# Altium PCB PPE2.PcbDoc (part 1 of 2)
Units mm, origin at the board's own origin, x right, y up, seen from the top; angles counter-clockwise.
Board outline 200 x 160 mm, 2 copper layers (Top Layer, Bottom Layer); 211 components, 151 nets, 640 pads, 213 vias.
Unrouted connection lines stored in the file: 3.
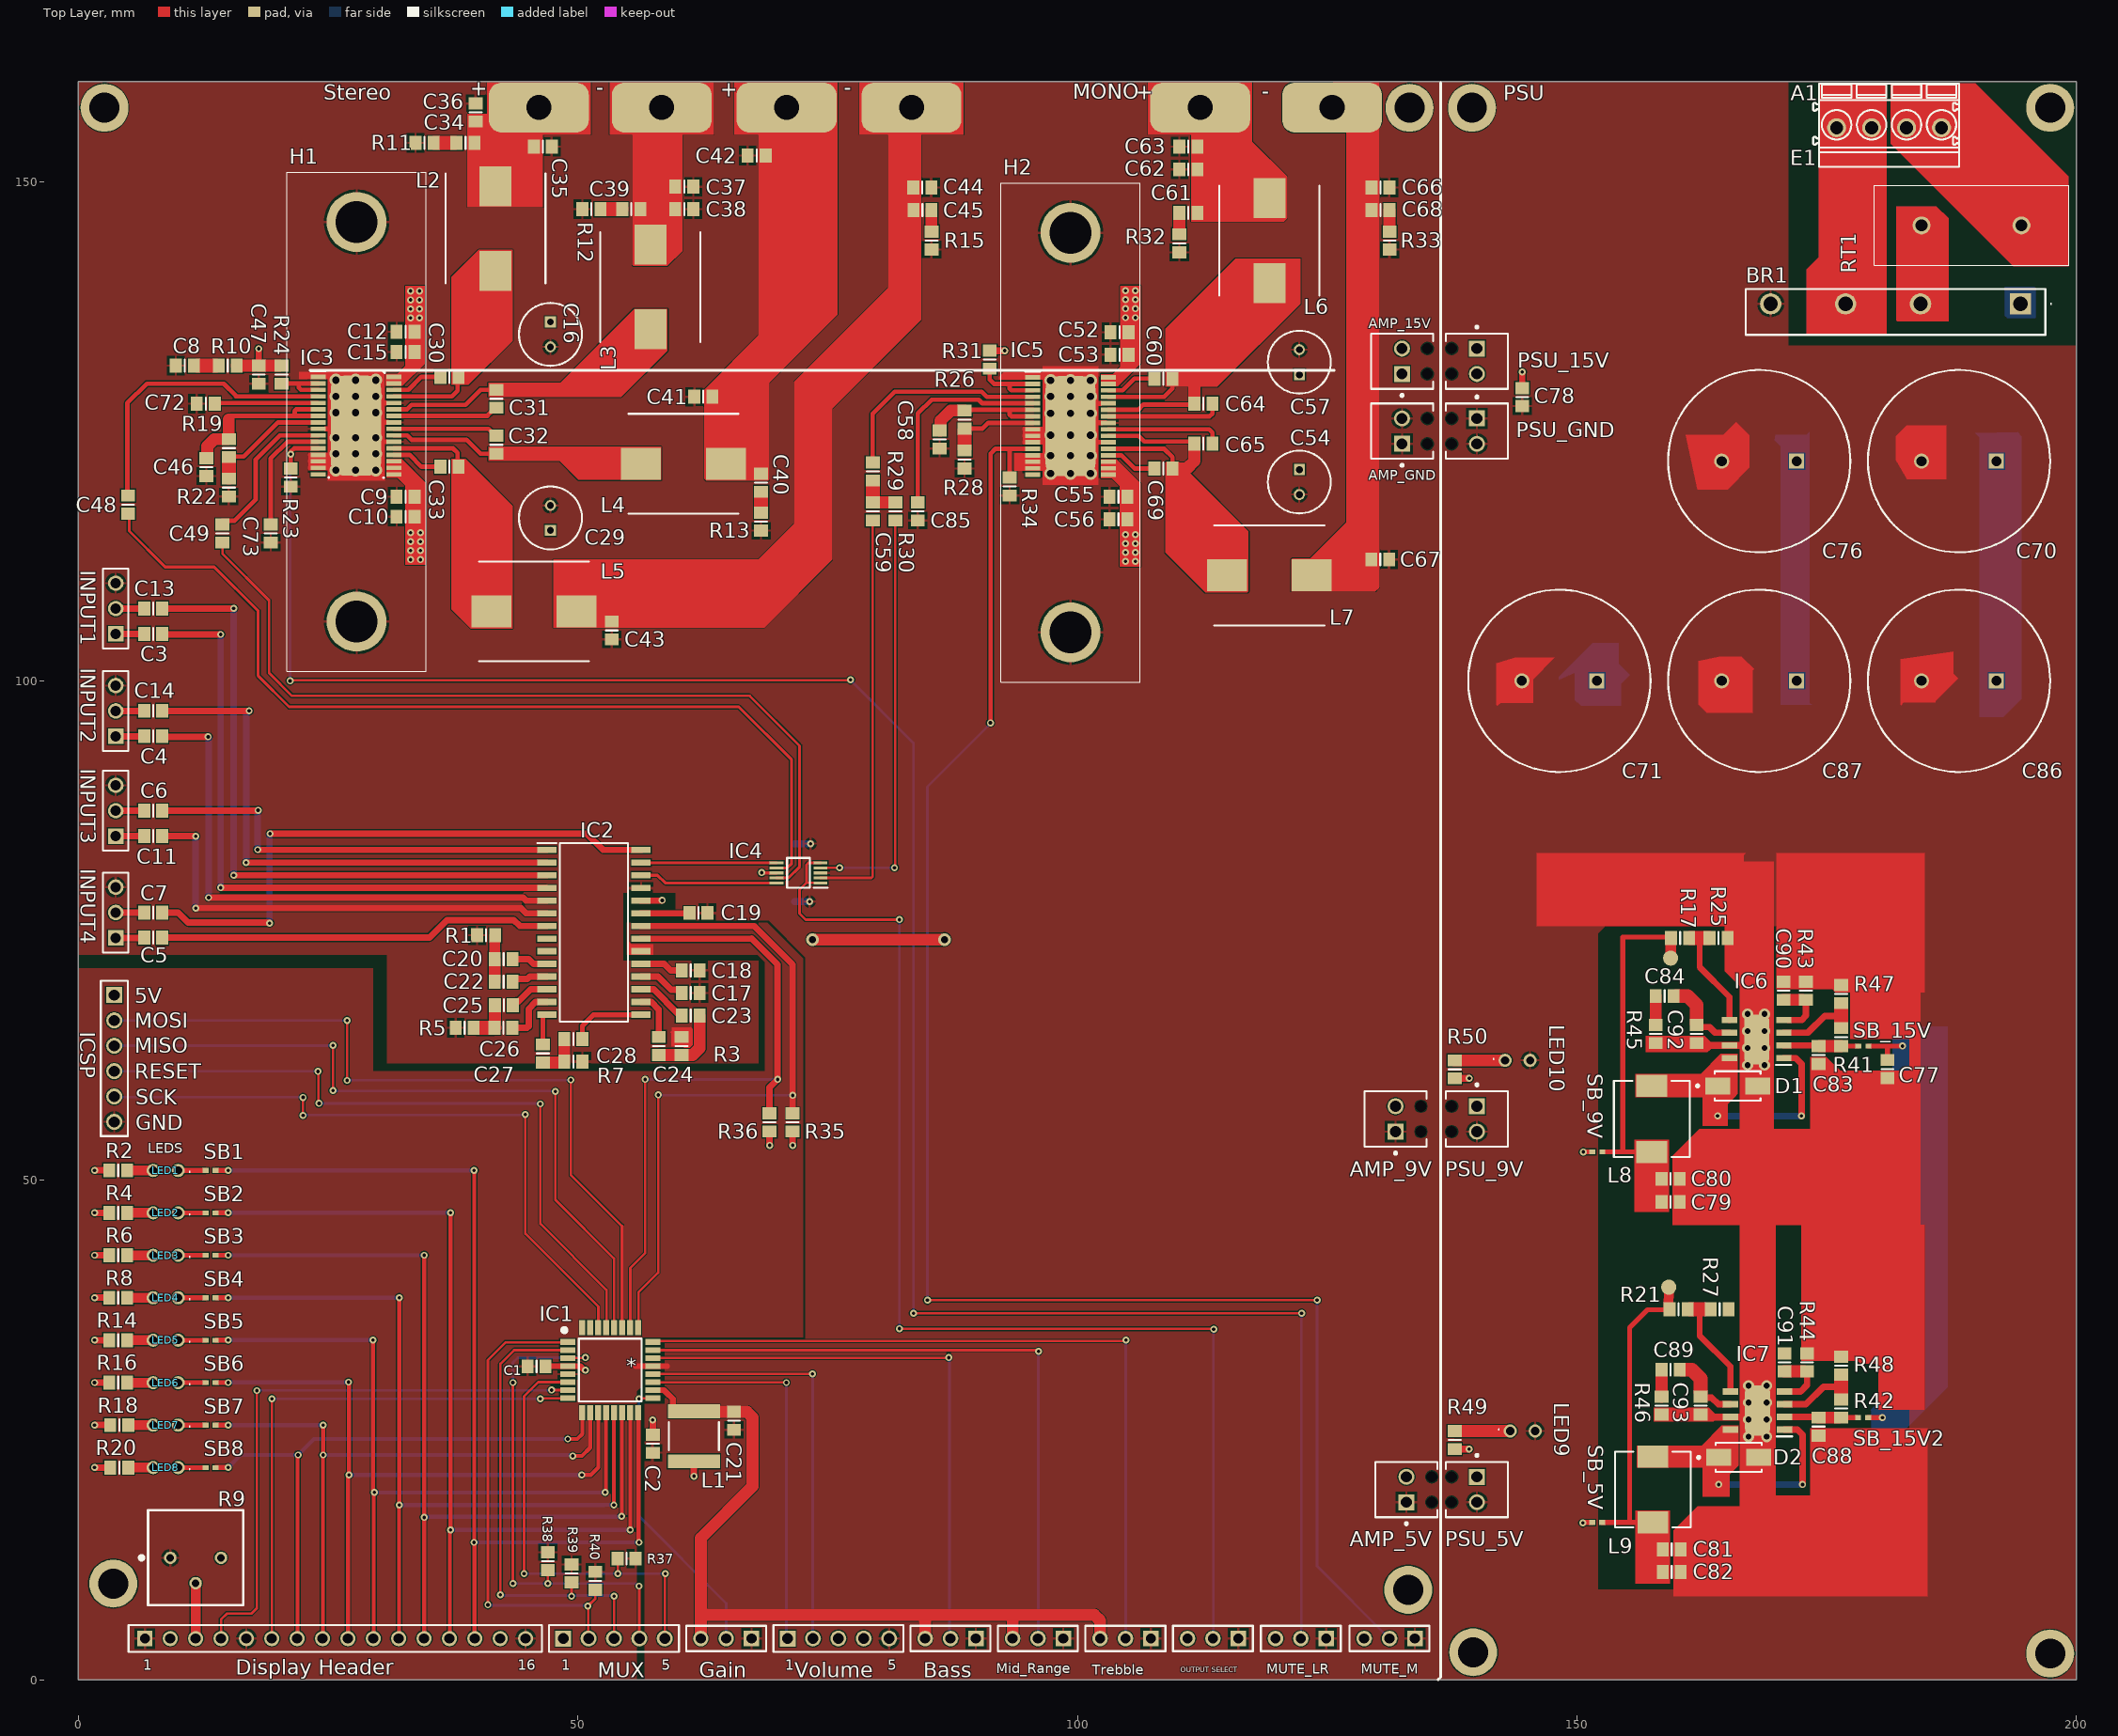
[diagram p0: Top Layer view]
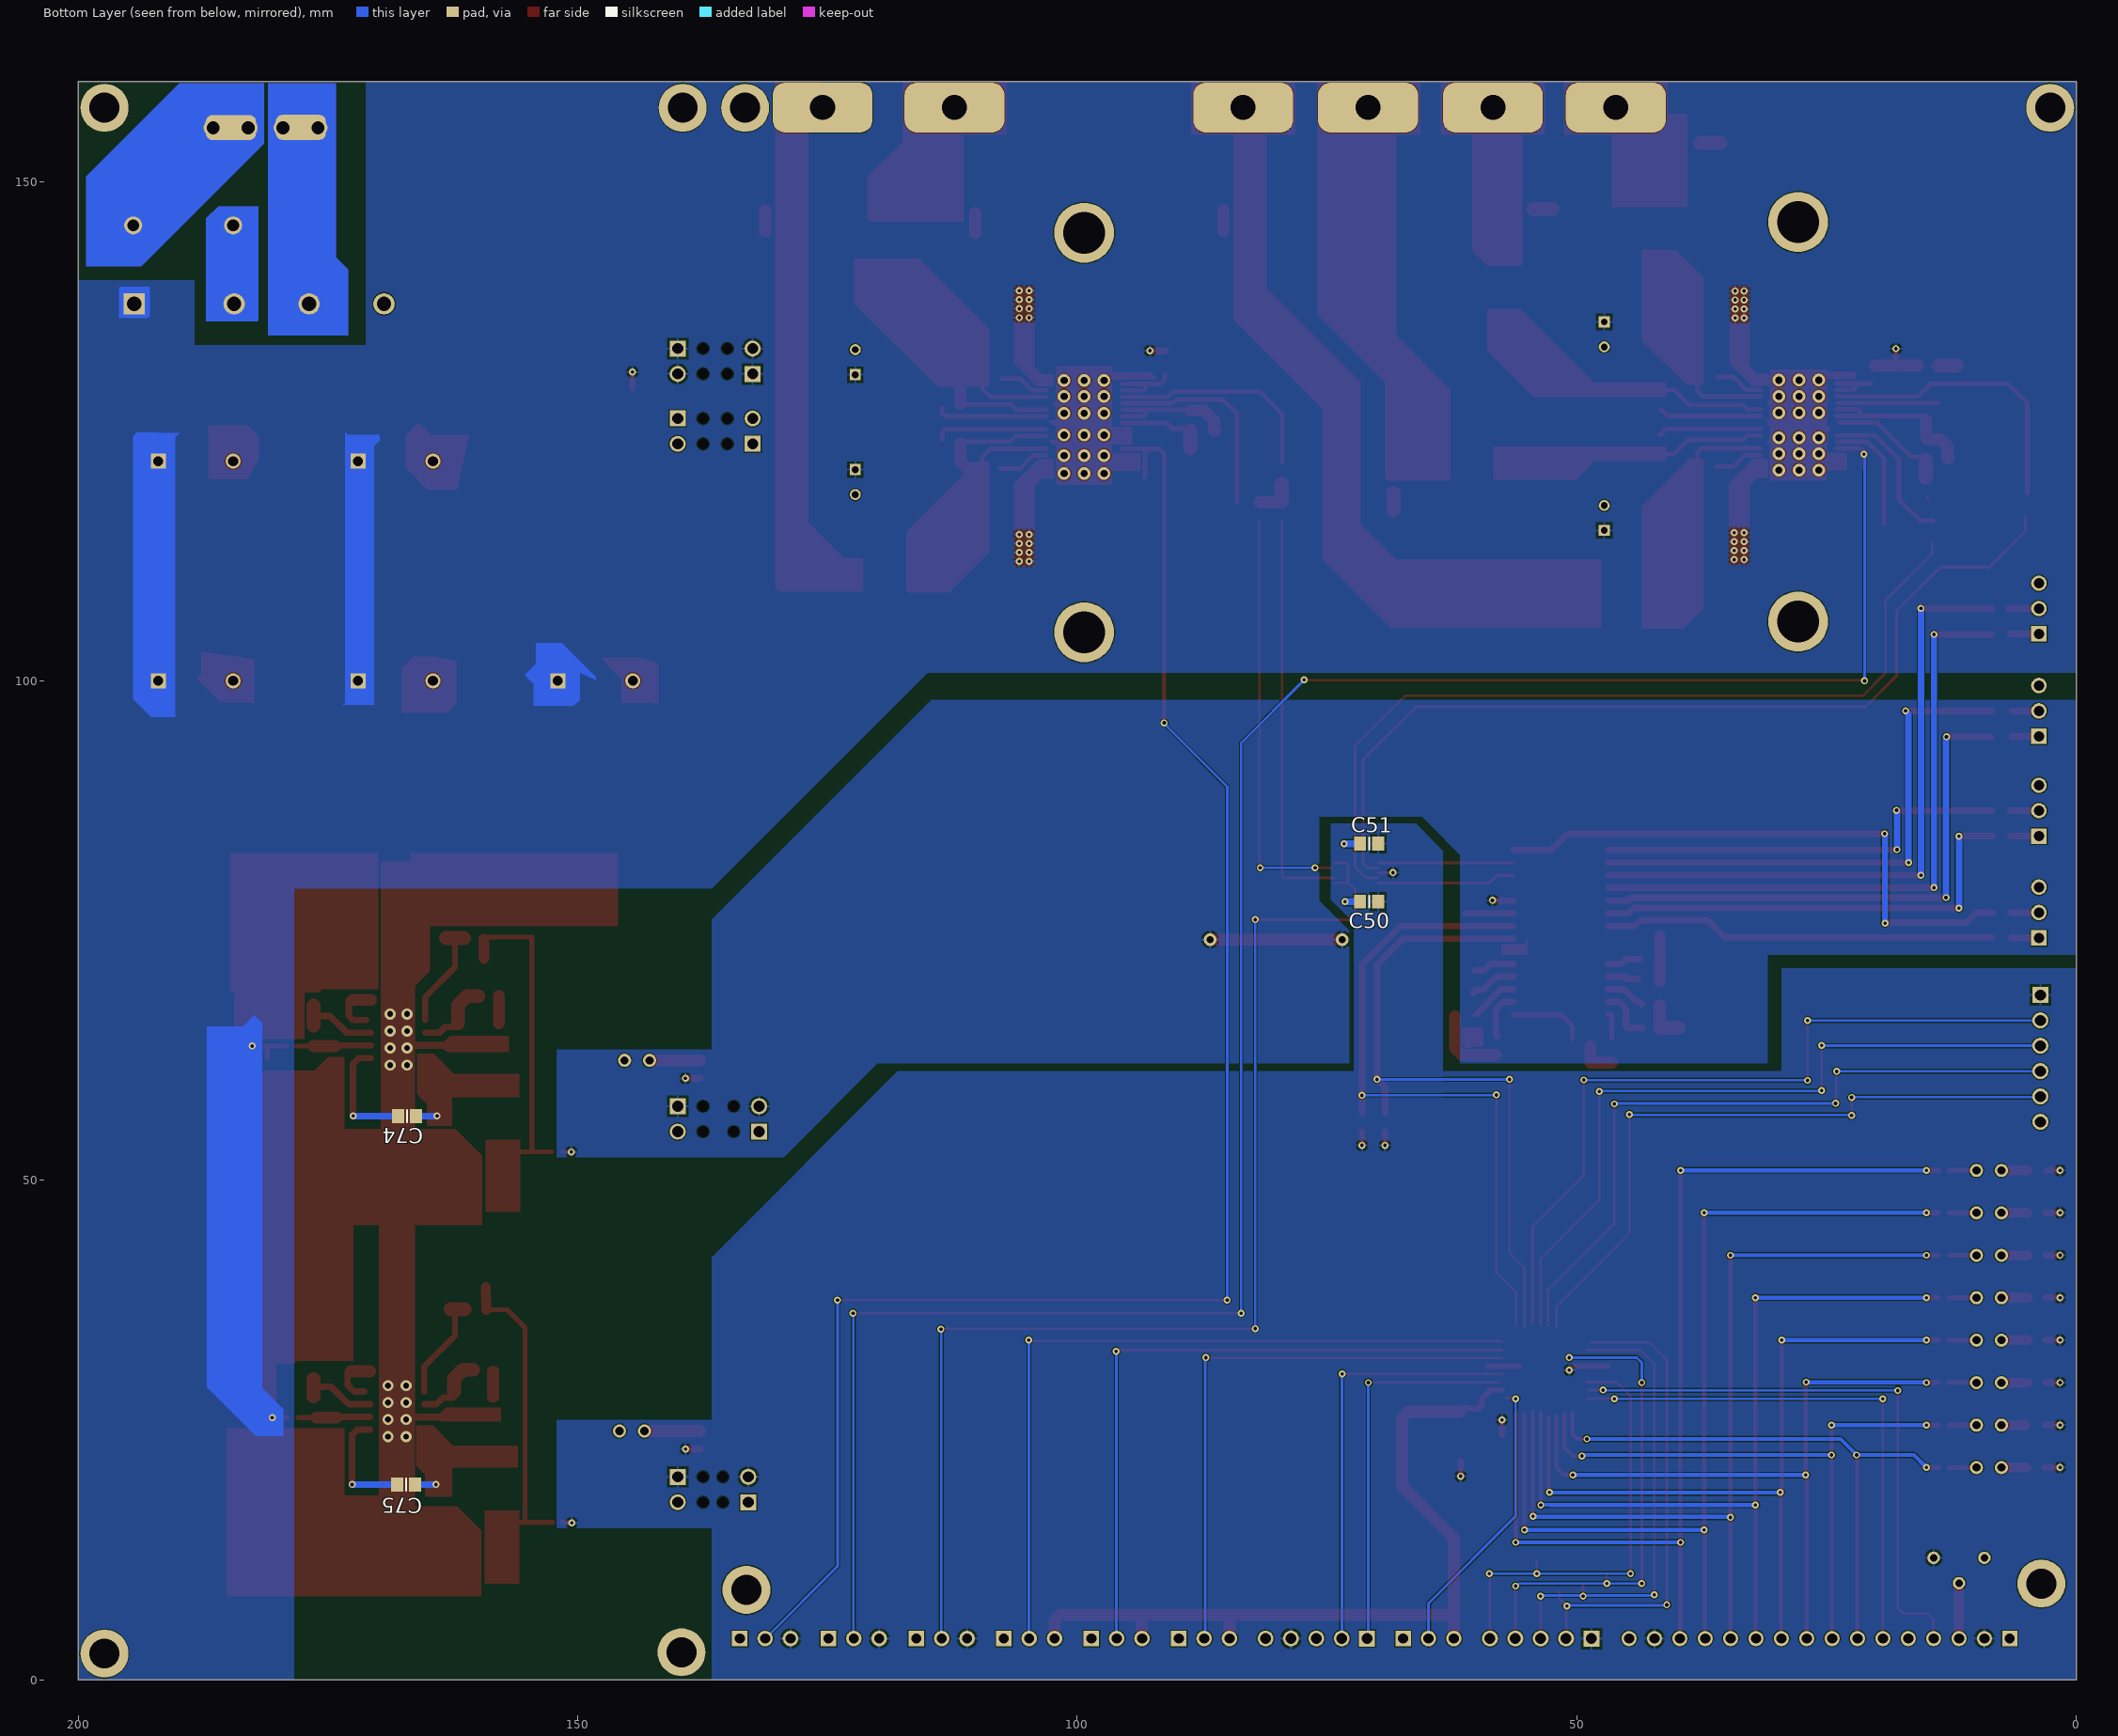
[diagram p1: Bottom Layer view, seen from below]

## Layer stack, top to bottom
Top Solder: solder mask 0.0102, Solder Resist, Dk 3.5
Top Layer: signal copper 0.0356
Dielectric 1: dielectric 0.32, FR-4, Dk 4.8
Bottom Layer: signal copper 0.0356
Bottom Solder: solder mask 0.0102, Solder Resist, Dk 3.5

## Board outline
0,0 0,160 200,160 200,0

## Design rules (kind name [scope] priority, off if disabled: settings)
Clearance [All] p1: gap=0.1 ignorepadtopadclearanceinfootprint=TRUE
PolygonConnect [All] p1: connectstyle=Relief reliefconductorwidth=0.254 reliefentries=4 polygonreliefangle="90 Angle" airgapwidth=0.254
RoutingVias [All] p1: holewidth=0.35 width=0.7 viastyle="Through Hole" minholewidth=0.3 minwidth=0.6 maxholewidth=0.4 maxwidth=0.8
SilkToSilkClearance [All] p1: silktosilkclearance=0.1
SolderMaskExpansion [All] p1: expansion=0.102 istentingtop=FALSE
Width [All] p1: maxlimit=5 minlimit=0.254 preferedwidth=0.254 minimp=50.000000 maximp=50.000000 favimp=50.000000
29 further rules are at their usual default settings.

## Classes and differential pairs
net class PA[9..0]: PA0 PA1 PA2 PA3 PA4 PA5 PA6 PA7 PA8 PA9
net class MUX[3..0]: MUX0 MUX1 MUX2 MUX3
component class Main: R35 R36
component class Designator: C8 C9 C10 C12 C15 C16 C29 C30 C31 C32 C33 C34 C35 C36 C37 C38 C39 C40 C41 C42 C43 C44 C45 C46 C47 C48 C49 C72 C73 H1 IC3 L2 L3 L4 L5 R10 R11 R12 R13 R15 R19 R22 R23 R24

## Components (designator, comment, footprint, x,y, rotation, side; value= is the part's Value field where it differs from the comment)
AMP_5V "1725656" PHOE-1725656-2 132.938,19.043 r90 top
AMP_9V "1725656" PHOE-1725656-2 131.851,56.142 r90 top
AMP_15V "1725656" PHOE-1725656-2 132.5,132 r90 top
AMP_GND "1725656" PHOE-1725656-2 132.5,125 r90 top
Bass "TSW-103-07-F-S" SMTC-TSW-103-07-X-S 89.848,4.125 r180 top
BR1 "GBJ3510_T0_00601" GBJ3510_T0_00601 194.4,137.746 r180 top
C1 "0805" 6-0805_N 45.875,31.375 r180 top value=100nF
C2 "0805" 6-0805_N 57.5,23.625 r270 top value=100nF
C3 "0805" 6-0805_N 7.5,104.7 r0 top value=470nF
C4 "0805" 6-0805_N 7.5,94.464 r0 top value=470nF
C5 "0805" 6-0805_N 7.5,74.29 r0 top value=470nF
C6 "0805" 6-0805_N 7.5,87 r0 top value=470nF
C7 "0805" 6-0805_N 7.5,76.8 r0 top value=470nF
C8 "0805" 6-0805_N 10.66,131.555 r180 top value=100nF
C9 "0805" 6-0805_N 32.76,118.44 r180 top value=1nF
C10 "0805" 6-0805_N 32.76,116.44 r180 top value=100nF
C11 "0805" 6-0805_N 7.5,84.45 r0 top value=470nF
C12 "0805" 6-0805_N 32.76,134.94 r180 top value=1nF
C13 "0805" 6-0805_N 7.5,107.25 r0 top value=470nF
C14 "0805" 6-0805_N 7.5,97 r0 top value=470nF
C15 "0805" 6-0805_N 32.76,132.94 r180 top value=100nF
C16 "860010373010" CAPPRD250W52D630H1250 47.26,135.94 r270 top
C17 "0805" 6-0805_N 61.3,68.755 r0 top value=5.6nF
C18 "0805" 6-0805_N 61.3,71.009 r0 top value=5.6nF
C19 "0805" 6-0805_N 62.075,76.775 r0 top value=10uF
C20 "0805" 6-0805_N 42.575,72.15 r180 top value=18nF
C21 "0805" 6-0805_N 65.625,25.921 r270 top value=100nF
C22 "0805" 6-0805_N 42.575,69.896 r180 top value=22nF
C23 "0805" 6-0805_N 61.3,66.5 r0 top value=18nF
C24 "0805" 6-0805_N 58.1,63.446 r270 top value=22nF
C25 "0805" 6-0805_N 42.6,67.525 r180 top value=100nF
C26 "0805" 6-0805_N 42.55,65.271 r180 top value=100nF
C27 "0805" 6-0805_N 46.5,62.7 r270 top value=100nF
C28 "0805" 6-0805_N 49.554,64.154 r180 top value=100nF
C29 "860010373010" CAPPRD250W52D630H1250 47.26,115.059 r90 top
C30 "0805" 6-0805_N 37.16,130.44 r0 top value=220nF
C31 "0805" 6-0805_N 41.86,128.24 r90 top value=220nF
C32 "0805" 6-0805_N 41.86,123.64 r270 top value=220nF
C33 "0805" 6-0805_N 37.16,121.44 r0 top value=220nF
C34 "0805" 6-0805_N 38.76,153.855 r0 top value=10nF
C35 "0805" 6-0805_N 46.5,153.5 r180 top value=1nF
C36 "0805" 6-0805_N 39.76,156.909 r270 top value=680nF
C37 "0805" 6-0805_N 60.66,149.474 r0 top value=1nF
C38 "0805" 6-0805_N 60.66,147.219 r0 top value=680nF
C39 "0805" 6-0805_N 55.36,147.219 r180 top value=10nF
C40 "0805" 6-0805_N 68.35,119.84 r90 top value=10nF
C41 "0805" 6-0805_N 62.56,128.44 r0 top value=680nF
C42 "0805" 6-0805_N 67.9,152.6 r0 top value=1nF
C43 "0805" 6-0805_N 53.397,105.051 r270 top value=680nF
C44 "0805" 6-0805_N 84.49,149.387 r0 top value=1nF
C45 "0805" 6-0805_N 84.493,147.133 r0 top value=10nF
C46 "0805" 6-0805_N 12.806,121.4 r270 top value=1uF
C47 "0805" 6-0805_N 18.06,130.655 r270 top value=10nF
C48 "0805" 6-0805_N 4.99,117.65 r90 top value=3.3uF
C49 "0805" 6-0805_N 14.43,114.755 r90 top value=3.3uF
C50 "0805" 6-0805_N 70.8,77.9 r0 bottom value=100nF
C51 "0805" 6-0805_N 70.8,83.7 r0 bottom value=1nF
C52 "0805" 6-0805_N 104.22,134.914 r180 top value=1nF
C53 "0805" 6-0805_N 104.22,132.66 r180 top value=100nF
C54 "860010373010" CAPPRD250W52D630H1250 122.22,121.16 r270 top
C55 "0805" 6-0805_N 104.12,118.431 r180 top value=1nF
C56 "0805" 6-0805_N 104.12,116.177 r180 top value=100nF
C57 "860010373010" CAPPRD250W52D630H1250 122.22,130.66 r90 top
C58 "0805" 6-0805_N 86.22,124.16 r270 top value=1uF
C59 "0805" 6-0805_N 79.52,120.96 r90 top value=10uF
C60 "0805" 6-0805_N 108.62,130.26 r0 top value=220nF
C61 "0805" 6-0805_N 111.12,146.86 r0 top value=10nF
C62 "0805" 6-0805_N 111.12,151.202 r0 top value=1nF
C63 "0805" 6-0805_N 111.12,153.481 r0 top value=1uF
C64 "0805" 6-0805_N 112.62,127.76 r180 top value=220nF
C65 "0805" 6-0805_N 112.62,123.76 r180 top value=220nF
C66 "0805" 6-0805_N 130.345,149.382 r0 top value=1uF
C67 "0805" 6-0805_N 130.32,112.16 r0 top value=1nF
C68 "0805" 6-0805_N 130.349,147.128 r0 top value=10nF
C69 "0805" 6-0805_N 108.62,121.26 r0 top value=220nF
C70 "UFW1V472MHD" CAPPRD750W80D1825H3750 192,122 r180 top
C71 "UFW1V472MHD" CAPPRD750W80D1825H3750 152,100 r180 top
C72 "0805" 6-0805_N 12.76,127.755 r0 top value=3.3uF
C73 "0805" 6-0805_N 19.26,114.755 r90 top value=3.3uF
C74 "0805" 6-0805_N 167.089,56.442 r180 bottom value=100nF
C75 "0805" 6-0805_N 167.189,19.543 r180 bottom value=100nF
C76 "UFW1V472MHD" CAPPRD750W80D1825H3750 172,122 r180 top
C77 "0805" 6-0805_N 181.089,61.142 r270 top value=100nf
C78 "0805" 6-0805_N 144.531,128.414 r270 top value=100nf
C79 "0805" 6-0805_N 159.389,47.842 r180 top value=47uF
C80 "0805" 6-0805_N 159.389,50.142 r180 top value=47uF
C81 "0805" 6-0805_N 159.489,13.039 r180 top value=47uF
C82 "0805" 6-0805_N 159.489,10.784 r180 top value=47uF
C83 "0805" 6-0805_N 174.189,62.542 r90 top value=10uF
C84 "0805" 6-0805_N 158.789,68.442 r0 top value=180pF
C85 "0805" 6-0805_N 84.029,116.96 r90 top value=10uF
C86 "UFW1V472MHD" CAPPRD750W80D1825H3750 192,100 r180 top
C87 "UFW1V472MHD" CAPPRD750W80D1825H3750 172,100 r180 top
C88 "0805" 6-0805_N 174.189,25.343 r90 top value=10uF
C89 "0805" 6-0805_N 159.389,31.043 r0 top value=180pF
C90 "0805" 6-0805_N 170.689,68.971 r270 top value=15nF
C91 "0805" 6-0805_N 170.789,31.772 r270 top value=15nF
C92 "0805" 6-0805_N 161.989,64.642 r90 top value=10pF
C93 "0805" 6-0805_N 162.389,27.443 r90 top value=10pF
D1 "B320A-13-F" FP-SMA-MFG 166.089,59.453 r0 top value=200pF
D2 "B320A-13-F" FP-SMA-MFG 166.189,22.254 r0 top value=200pF
"Display Header" "61301611821" 61301611821 25.721,4.125 r0 top
E1 "1845040000" LM_3_5_90_04 181.25,155.625 r180 top
Gain "TSW-103-07-F-S" SMTC-TSW-103-07-X-S 67.389,4.125 r180 top
H1 "ATS-TI1OP-521-C1-R1" ATSTI1OP521C1R1 27.86,105.94 r90 top locked
H2 "ATS-TI1OP-521-C1-R1" ATSTI1OP521C1R1 99.32,104.86 r90 top
IC1 "ATTINY828-AU" QFP80P900X900X120-32N 53.25,31 r0 top
IC2 "TDA7439DS13TR" SOIC127P1032X265-28N 51.613,74.825 r0 top
IC3 "TPA3116D2QDADRQ1" SOP65P810X120-33N 27.798,125.555 r0 top
IC4 "TS5A23157DGSRE4" SOP50P490X110-10N 72.092,80.775 r180 top
IC5 "TPA3116D2QDADRQ1" SOP65P810X120-33N 99.32,125.51 r0 top
IC6 "TPS54332DDA" SOIC127P600X170-9N 167.989,64.142 r180 top
IC7 "TPS54332DDA" SOIC127P600X170-9N 168.077,26.943 r180 top
ICSP "61300611121" 61300611121 3.6,62.2 r270 top
INPUT1 "TSW-103-07-F-S" SMTC-TSW-103-07-X-S 3.75,104.7 r90 top
INPUT2 "TSW-103-07-F-S" SMTC-TSW-103-07-X-S 3.75,94.45 r90 top
INPUT3 "TSW-103-07-F-S" SMTC-TSW-103-07-X-S 3.75,84.46 r90 top
INPUT4 "TSW-103-07-F-S" SMTC-TSW-103-07-X-S 3.75,74.27 r90 top
L1 "Inductor" 2220 61.621,24.371 r90 top value=10mH
L2 "10uH" INDPM110100X400N 41.76,145.284 r90 top
L3 "10uH" INDPM110100X400N 57.26,139.44 r90 top
L4 "10uH" INDPM110100X400N 60.57,121.74 r0 top
L5 "10uH" INDPM110100X400N 45.618,106.955 r0 top
L6 "10uH" INDPM110100X400N 119.22,144.085 r90 top
L7 "10uH" INDPM110100X400N 119.22,110.556 r0 top
L8 "2.5uF" 710-74437346025 157.51,56.142 r270 top
L9 "2.5uF" 710-74437346025 157.61,19.043 r270 top
LED1 "ELM70303GD" ELM70303GD 10,50.99 r90 top
LED2 "ELM70303GD" ELM70303GD 10,46.74 r90 top
LED3 "ELM70303GD" ELM70303GD 10,42.49 r90 top
LED4 "ELM70303GD" ELM70303GD 10,38.24 r90 top
LED5 "ELM70303GD" ELM70303GD 10,33.99 r90 top
LED6 "ELM70303GD" ELM70303GD 10,29.74 r90 top
LED7 "ELM70303GD" ELM70303GD 10,25.49 r90 top
LED8 "ELM70303GD" ELM70303GD 10,21.24 r90 top
LED9 "ELM70303GD" ELM70303GD 143.33,24.9 r270 top
LED10 "ELM70303GD" ELM70303GD 142.82,62.01 r270 top
Mid_Range "TSW-103-07-F-S" SMTC-TSW-103-07-X-S 98.602,4.125 r180 top
MUTE_LR "TSW-103-07-F-S" SMTC-TSW-103-07-X-S 124.915,4.125 r180 top
MUTE_M "TSW-103-07-F-S" SMTC-TSW-103-07-X-S 133.79,4.125 r180 top
MUX "61300511121" 61300511121 53.62,4.125 r0 top
"OUTPUT SELECT" "TSW-103-07-F-S" SMTC-TSW-103-07-X-S 116.111,4.125 r180 top
PSU_5V "1725656" PHOE-1725656-2 140,19.043 r270 top
PSU_9V "1725656" PHOE-1725656-2 140,56.142 r270 top
PSU_15V "1725656" PHOE-1725656-2 140,132 r270 top
PSU_GND "1725656" PHOE-1725656-2 140,125 r270 top
R1 "0805" 6-0805_N 40.825,74.525 r0 top value=2K7
R2 "0805" 6-0805_N 4,50.99 r0 top value=330
R3 "0805" 6-0805_N 60.4,63.446 r270 top value=2K7
R4 "0805" 6-0805_N 4,46.74 r0 top value=330
R5 "0805" 6-0805_N 38.675,65.275 r0 top value=5K6
R6 "0805" 6-0805_N 4,42.49 r0 top value=330
R7 "0805" 6-0805_N 49.554,61.9 r180 top value=5K6
R8 "0805" 6-0805_N 4,38.24 r0 top value=330
R9 "3386P-1-103LF" 3386P_1 16.515,16.987 r180 top
R10 "0805" 6-0805_N 14.96,131.555 r0 top value=3.3
R11 "0805" 6-0805_N 34.66,153.855 r0 top value=3.3
R12 "0805" 6-0805_N 51.36,147.219 r180 top value=3.3
R13 "0805" 6-0805_N 68.35,115.94 r90 top value=3.3
R14 "0805" 6-0805_N 4,33.99 r0 top value=330
R15 "0805" 6-0805_N 85.421,144.078 r270 top value=3.3
R16 "0805" 6-0805_N 4,29.74 r0 top value=330
R17 "0805" 6-0805_N 160.335,74.242 r0 top value=10k
R18 "0805" 6-0805_N 4.1,25.49 r0 top value=330
R19 "0805" 6-0805_N 15.06,123.3 r90 top value=100K
R20 "0805" 6-0805_N 4.1,21.24 r0 top value=330
R21 "0805" 6-0805_N 160.189,37.072 r0 top value=10K
R22 "0805" 6-0805_N 15.06,119.355 r90 top value=20K
R23 "0805" 6-0805_N 21.26,120.355 r90 top value=100K
R24 "0805" 6-0805_N 20.36,130.655 r90 top value=100K
R25 "0805" 6-0805_N 164.192,74.243 r0 top value=1K
R26 "0805" 6-0805_N 88.72,126.16 r90 top value=47K
R27 "0805" 6-0805_N 164.289,37.072 r0 top value=1K9
R28 "0805" 6-0805_N 88.72,122.16 r90 top value=75K
R29 "0805" 6-0805_N 81.774,116.96 r270 top value=470
R30 "0805" 6-0805_N 79.52,116.96 r270 top value=470
R31 "0805" 6-0805_N 91.22,132.16 r90 top value=100K
R32 "0805" 6-0805_N 110.2,143.806 r90 top value=3.3
R33 "0805" 6-0805_N 131.267,144.073 r270 top value=3.3
R34 "0805" 6-0805_N 93.22,119.46 r90 top value=100K
R35 "0805" 6-0805_N 71.5,55.8 r270 top value=10K
R36 "0805" 6-0805_N 69.2,55.8 r270 top value=10K
R37 "0805" 6-0805_N 54.875,12.125 r180 top value=10K
R38 "0805" 6-0805_N 47,11.875 r270 top value=10K
R39 "0805" 6-0805_N 49.375,10.65 r270 top value=10K
R40 "0805" 6-0805_N 51.75,9.9 r270 top value=10K
R41 "0805" 6-0805_N 176.443,64.342 r90 top value=150K
R42 "0805" 6-0805_N 176.443,27.143 r90 top value=150K
R43 "0805" 6-0805_N 172.943,68.971 r90 top value=1M
R44 "0805" 6-0805_N 173.043,31.772 r90 top value=1M
R45 "0805" 6-0805_N 157.889,64.642 r270 top value=75K
R46 "0805" 6-0805_N 158.489,27.443 r270 top value=75K
R47 "0805" 6-0805_N 176.443,68.642 r90 top value=48.7K
R48 "0805" 6-0805_N 176.443,31.443 r90 top value=48.7K
R49 "0805" 6-0805_N 137.77,24 r90 top value=330
R50 "0805" 6-0805_N 137.77,61.11 r90 top value=330
RT1 "5D2-18LCS" 5D218LCS 194.5,145.6 r180 top
SB1 "0402" 0402 13.25,50.99 r0 top value=SB
SB2 "0402" 0402 13.25,46.74 r0 top value=SB
SB3 "0402" 0402 13.25,42.49 r0 top value=SB
SB4 "0402" 0402 13.25,38.24 r0 top value=SB
SB5 "0402" 0402 13.25,33.99 r0 top value=SB
SB6 "0402" 0402 13.25,29.74 r0 top value=SB
SB7 "0402" 0402 13.25,25.49 r0 top value=SB
SB8 "0402" 0402 13.25,21.24 r0 top value=SB
SB_5V "0402" 0402 152.04,15.74 r0 top value=SB
SB_9V "0402" 0402 152.049,52.842 r180 top value=SB
SB_15V "0402" 0402 178.689,63.442 r180 top value=SB
SB_15V2 "0402" 0402 178.648,26.243 r0 top value=SB
Trebble "TSW-103-07-F-S" SMTC-TSW-103-07-X-S 107.356,4.125 r180 top
Volume "61300511121" 61300511121 76.079,4.125 r0 top

## Footprints (in the part's own frame and the unit in brackets; to place one, negate y for a bottom-side part, rotate by r counter-clockwise, add the part's x,y. Pads: shape width x height; smd on the part's side, far side on the other; paste and mask are expansions set on the pad)
5D218LCS [mm]
  round 1.8 hole 1.2: 1(0,0) 2(10,0)
  silkscreen extent -4.75,-4 14.75,4, body extent -4.75,-4 14.75,4, height 23.1
6-0805_N [mm] "Chip Resistor, Body 2.0x1.2mm, IPC Medium Density"
  rect 1.2x1.4 smd: 1(-0.9,0) 2(0.9,0)
  silkscreen extent 0,-0.6 0,0.6, body extent -1.07,-0.7 1.07,0.7, height 0.7
0402 [mm] "Chip Capacitor, Body 1.0x0.5mm, IPC High Density"
  rect 0.6x0.5 smd: 1(-0.5,0) 2(0.5,0)
  body extent -0.55,-0.3 0.55,0.3, height 1.3
710-74437346025 [mm]
  rect 2.2x3.1 smd: 1(-3.3,0) 2(3.3,0)
  silkscreen extent -3.8,-3.8 3.8,3.8, body extent -3.8,-3.8 3.8,3.8, height 2.8
2220 [mm] "Chip Capacitor, Body 5.7x5.0mm, IPC High Density"
  rect 1.4x5.2 smd: 1(-2.5,0) 2(2.5,0)
  silkscreen extent -1.4,-2.5 1.4,2.5, body extent -2.95,-2.63 2.95,2.63, height 1.4
3386P_1 [mm]
  round 1.25 hole 0.75: 1(7.305,4.78) 2(4.765,7.32) 3(2.225,4.78)
  silkscreen extent 0,0 10.35,9.53, body extent 0.18,0.21 9.7,9.74, height 4.76
61300511121 [mm] "Pin Header, pitch 2.54 mm, THT, Vertical, single row, 5p"
  rect 1.6x1.6 hole 1.1: 1(-5.08,0)
  round 1.6 hole 1.1: 2(-2.54,0) 3(0,0) 4(2.54,0) 5(5.08,0)
  silkscreen extent -6.5,-1.35 6.5,1.35, body extent -6.35,-1.27 6.35,1.27, height 8.57
61300611121 [mm] "Pin Header, pitch 2.54 mm, THT, Vertical, single row, 6p"
  rect 1.6x1.6 hole 1.1: 1(-6.35,0)
  round 1.6 hole 1.1: 2(-3.81,0) 3(-1.27,0) 4(1.27,0) 5(3.81,0) 6(6.35,0)
  silkscreen extent -7.77,-1.35 7.77,1.35, body extent -7.62,-1.27 7.62,1.27, height 8.57
61301611821 [mm] "Socket Header, Pitch 2.54 mm, THT, Vertical, single row, 16p"
  rect 1.52x1.52 hole 1.02: 1(-19.05,0)
  round 1.52 hole 1.02: 2(-16.51,0) 3(-13.97,0) 4(-11.43,0) 5(-8.89,0) 6(-6.35,0) 7(-3.81,0) 8(-1.27,0) 9(1.27,0) 10(3.81,0) 11(6.35,0) 12(8.89,0) 13(11.43,0) 14(13.97,0) 15(16.51,0) 16(19.05,0)
  silkscreen extent -20.7,-1.35 20.7,1.35, body extent -20.57,-1.25 20.57,1.25, height 8.55
ATSTI1OP521C1R1 [mm]
  round 6 hole 4.2: 1(0,0) 2(40,0)
  silkscreen extent -5,-6.95 45,6.95, body extent -5,-6.95 45,6.95, height 28.1
CAPPRD250W52D630H1250 [mm]
  rect 1.1x1.1 hole 0.7: 1(0,0)
  round 1.1 hole 0.7: 2(2.5,0)
  silkscreen extent -1.9,-3.15 4.4,3.15, body extent -2.14,-3.4 4.65,3.4, height 12.5
CAPPRD750W80D1825H3750 [mm]
  rect 1.5x1.5 hole 1: 1(0,0)
  round 1.5 hole 1: 2(7.5,0)
  silkscreen extent -5.38,-9.12 12.87,9.12, body extent -5.5,-9.23 13,9.23, height 37.5
ELM70303GD [mm]
  round 1.321 hole 0.813: 1(0,0) 2(0,2.5)
  silkscreen extent -0.2,-1.2 -0.1,-1.1, body extent -1.9,-0.65 1.9,3.15, height 5.3
FP-SMA-MFG [mm]
  rect 2.5x1.7 smd paste+0 mask+0: 1(-2,0) 2(2,0)
  silkscreen extent -4.12,-1.46 2.3,1.46, body extent -3.35,-1.56 3.35,1.56, height 0.25
GBJ3510_T0_00601 [mm]
  rect 2.13x2.13 hole 1.42: 1(0,0)
  round 2.13 hole 1.42: 2(10,0) 3(17.5,0) 4(25,0)
  silkscreen extent -3.1,-1.5 27.5,3.1, body extent -2.5,-1.5 27.5,3.1, height 24.7
INDPM110100X400N [mm]
  rect 4x3.2 smd: 1(-4.25,0) 2(4.25,0)
  silkscreen extent -5.5,-5 5.5,5, body extent -5.5,-5 5.5,5, height 4
LM_3_5_90_04 [mm] "OMNIMATE Signal - Serie LM  LM 3.50/04/90 3.2"
  round 1.9 hole 1.3: A1(-5.25,0.25) A2(-1.75,0.25) A3(1.75,0.25) A4(5.25,0.25)
  silkscreen extent -7,-4.15 7.6,4.15, body extent -7,-4.15 7.6,4.15, height 12.81
PHOE-1725656-2 [mm] "Connector, 2-Leads, Body 6.2x5.4mm, Pitch 2.54mm"
  rect 1.6x1.6 hole 1.1: 1(-1.27,0)
  round 1.6 hole 1.1: 2(1.27,0)
  round 0 hole 1.1 unplated: MH1(-1.27,-2.54) MH2(1.27,-2.54)
  silkscreen extent -3.54,-3.1 2.77,3.1, body extent -2.77,-3.1 2.77,3.1, height 9
QFP80P900X900X120-32N [mm]
  rect 1.5x0.6 smd: 1(-4.25,2.8) 2(-4.25,2) 3(-4.25,1.2) 4(-4.25,0.4) 5(-4.25,-0.4) 6(-4.25,-1.2) 7(-4.25,-2) 8(-4.25,-2.8) 17(4.25,-2.8) 18(4.25,-2) 19(4.25,-1.2) 20(4.25,-0.4) 21(4.25,0.4) 22(4.25,1.2) 23(4.25,2) 24(4.25,2.8)
  rect 0.6x1.5 smd: 9(-2.8,-4.25) 10(-2,-4.25) 11(-1.2,-4.25) 12(-0.4,-4.25) 13(0.4,-4.25) 14(1.2,-4.25) 15(2,-4.25) 16(2.8,-4.25) 25(2.8,4.25) 26(2,4.25) 27(1.2,4.25) 28(0.4,4.25) 29(-0.4,4.25) 30(-1.2,4.25) 31(-2,4.25) 32(-2.8,4.25)
  silkscreen extent -4.8,-3.15 3.15,4.2, body extent -4.5,-4.5 4.5,4.5, height 1.2
SMTC-TSW-103-07-X-S [mm] ".025 SQ Post Terminal Strip Assembly, 1x3 Pins, Vertical, 2.54mm Pitch, Male"
  rect 1.55x1.55 hole 1.02: 1(0,0)
  round 1.55 hole 1.02: 2(2.54,0) 3(5.08,0)
  silkscreen extent -1.46,-1.27 6.54,1.27, body extent -1.27,-1.27 6.35,1.27, height 8.38
SOIC127P600X170-9N [mm]
  rect 1.525x0.65 smd: 1(-2.712,1.905) 2(-2.712,0.635) 3(-2.712,-0.635) 4(-2.712,-1.905) 5(2.712,-1.905) 6(2.712,-0.635) 7(2.712,0.635) 8(2.712,1.905)
  rect 2.13x3 smd: 9(0,0)
  silkscreen extent -3.47,2.58 -1.95,2.58, body extent -3,-2.45 3,2.45, height 1.57
SOIC127P1032X265-28N [mm]
  rect 1.925x0.65 smd: 1(-4.712,8.255) 2(-4.712,6.985) 3(-4.712,5.715) 4(-4.712,4.445) 5(-4.712,3.175) 6(-4.712,1.905) 7(-4.712,0.635) 8(-4.712,-0.635) 9(-4.712,-1.905) 10(-4.712,-3.175) 11(-4.712,-4.445) 12(-4.712,-5.715) 13(-4.712,-6.985) 14(-4.712,-8.255) 15(4.712,-8.255) 16(4.712,-6.985) 17(4.712,-5.715) 18(4.712,-4.445) 19(4.712,-3.175) 20(4.712,-1.905) 21(4.712,-0.635) 22(4.712,0.635) 23(4.712,1.905) 24(4.712,3.175) 25(4.712,4.445) 26(4.712,5.715) 27(4.712,6.985) 28(4.712,8.255)
  silkscreen extent -5.68,-8.95 3.4,8.95, body extent -5.16,-8.95 5.16,8.95, height 2.65
SOP50P490X110-10N [mm]
  rect 1.4x0.3 smd: 1(-2.2,1) 2(-2.2,0.5) 3(-2.2,0) 4(-2.2,-0.5) 5(-2.2,-1) 6(2.2,-1) 7(2.2,-0.5) 8(2.2,0) 9(2.2,0.5) 10(2.2,1)
  silkscreen extent -2.9,-1.5 1.15,1.5, body extent -2.46,-1.5 2.46,1.5, height 1.1
SOP65P810X120-33N [mm]
  rect 1.475x0.45 smd: 1(-3.788,4.875) 2(-3.788,4.225) 3(-3.788,3.575) 4(-3.788,2.925) 5(-3.788,2.275) 6(-3.788,1.625) 7(-3.788,0.975) 8(-3.788,0.325) 9(-3.788,-0.325) 10(-3.788,-0.975) 11(-3.788,-1.625) 12(-3.788,-2.275) 13(-3.788,-2.925) 14(-3.788,-3.575) 15(-3.788,-4.225) 16(-3.788,-4.875) 17(3.788,-4.875) 18(3.788,-4.225) 19(3.788,-3.575) 20(3.788,-2.925) 21(3.788,-2.275) 22(3.788,-1.625) 23(3.788,-0.975) 24(3.788,-0.325) 25(3.788,0.325) 26(3.788,0.975) 27(3.788,1.625) 28(3.788,2.275) 29(3.788,2.925) 30(3.788,3.575) 31(3.788,4.225) 32(3.788,4.875)
  rect 3.04x3.74 smd: 33(0,0)
  silkscreen extent -4.52,5.45 -3.05,5.45, body extent -4.06,-5.5 4.06,5.5, height 1

## Part data
AMP_5V AMP_9V AMP_15V AMP_GND PSU_5V PSU_9V PSU_15V PSU_GND: library part CMP-2000-05299-1, "Male Header, Pitch 2.54 mm, 1 x 2 Position, Height 9 mm, Tail Length 3.5 mm", Colour=Green, Manufacturer="Phoenix Contact", Content=250pc(s), Datasheet URL=http://datasheet.octopart.com/1725656-Phoenix-Contact-datasheet-5302866.pdf, Datasheet Version=Apr-08, Industrial packaging=Yes, Manufacturer part No.=1725656, Manufacturer URL=http://www.phoenixcontact.com/, Number of contacts=2, Pitch=2.54mm, Type=MPT0,5/2-2,54
Bass Gain INPUT1 INPUT2 INPUT3 INPUT4 Mid_Range MUTE_LR MUTE_M "OUTPUT SELECT" Trebble: library part CMP-1024-00331-1, "0.025\" SQ Post Header, Through-hole, Vertical, -55 to 125 degC, 2.54 mm Pitch, 3-Pin, Male, RoHS", Manufacturer=Samtec, Temperature Range="-55 to 125 degC", ComponentLink1Description="Manufacturer URL", ComponentLink1URL=http://www.samtec.com, ComponentLink2Description=Datasheet, ComponentLink2URL=http://www.samtec.com/documents/webfiles/pdf/TSW_TH.PDF, ComponentLink3Description="Package Specification", ComponentLink3URL=http://www.samtec.com/documents/webfiles/cpdf/TSW-XXX-XX-XXX-X-XX-XXX-MKT.pdf, DatasheetVersion=F-214, Mounting Technology=Through-hole, Orientation=Vertical, PackageDescription=".025[0.64] SQ. Post Terminal Strip Assembly", PackageReference=TSW-103-07-X-S, PackageVersion="DM, 8/1988", PartNumber=TSW-103-07-F-S, Pitch="2.54 mm", RoHS=True
BR1: "Bridge Rectifier", Manufacturer_Name=PANJIT, Mouser Part Number=241-GBJ3510_T0_00601, Datasheet Link=https://www.panjit.com.tw/upload/datasheet/GBJ3510.pdf, Height=24.6mm, Manufacturer_Part_Number=GBJ3510_T0_00601, Mouser Price/Stock=https://www.mouser.co.uk/ProductDetail/Panjit/GBJ3510_T0_00601?qs=tlsG%2FOw5FFggsibJfWBTvQ%3D%3D
C1 C2 C3 C4 C5 C6 C7 C8 C9 C10 C11 C12 C13 C14 C15 C17 C18 C19 C20 C21 C22 C23 C24 C25 C26 C27 C28 C30 C31 C32 C33 C34 C35 C36 C37 C38 C39 C40 C41 C42 C43 C44 C45 C46 C47 C48 C49 C50 C51 C52 C53 C55 C56 C58 C59 C60 C61 C62 C63 C64 C65 C66 C67 C68 C69 C72 C73 C74 C75 C77 C78 C79 C80 C81 C82 C83 C84 C85 C88 C89 C90 C91 C92 C93: library part Cap, "Capacitor", LatestRevisionDate=17-Jul-2002, LatestRevisionNote="Re-released for DXP Platform.", PackageDescription="Radial Cap, Thru-Hole; 2 Leads; 0.3 in Pin Spacing", PackageReference=RAD-0.3, Published=8-Jun-2000, Publisher="Altium Limited"
C16 C29 C54 C57: "Capacitor Polarised", Manufacturer_Name="Wurth Elektronik", Mouser Part Number=710-860010373010, Datasheet Link=https://ms.componentsearchengine.com/Datasheets/2/860010373010.pdf, Height=12.5mm, Manufacturer_Part_Number=860010373010, Mouser Price/Stock=https://www.mouser.com/Search/Refine.aspx?Keyword=710-860010373010
C70 C71 C76 C86 C87: "Capacitor Polarised", Manufacturer_Name=Nichicon, Mouser Part Number=647-UFW1V472MHD, Arrow Part Number=UFW1V472MHD, Arrow Price/Stock=https://www.arrow.com/en/products/ufw1v472mhd/nichicon, Datasheet Link=https://www.nichicon.co.jp/english/products/pdfs/e-ufw.pdf, Height=37.5mm, Manufacturer_Part_Number=UFW1V472MHD, Mouser Price/Stock=https://www.mouser.co.uk/ProductDetail/Nichicon/UFW1V472MHD?qs=kArNe9LFxXnJL9rvReZXrQ%3D%3D
D1 D2: library part CMP-12790-000001-1, "DIODE SCHOTTKY 20V 3A SMA", Capacitance=200pF, Forward Current=3A, Manufacturer="Diodes Inc.", Max Junction Temp=+150°C, Max Repetitive Reverse Voltage=20V, Max Surge Forward Current=80A, Package=SMA, Peak Reverse Current=0.5mA, Temperature="-55°C to +150°C", Temperature Range Low=-55°C, Automotive=Yes, Automotive Grade="Grade 0", Category=Diode, ComponentLink2Description=Datasheet, ComponentLink2URL=https://www.diodes.com/assets/Datasheets/B320A_B360A.pdf, Device Class L1="Discrete Semiconductors", Device Class L2=Diodes, Device Class L3="Schottky Diodes", Digikey Description="DIODE SCHOTTKY 20V 3A SMA", Footprint Url=https://www.diodes.com/assets/Package-Files/SMA.pdf, Height=2.4mm, Lead Free=Yes, Manufacturer Part Number=B320A-13-F, Mouser Description="Schottky Diodes & Rectifiers 20V 3A", Octopart=https://octopart.com/b320a-13-f-diodes+inc.-325803, Reverse Voltage=20V, RoHS=TRUE, Standoff Height=0.05mm, Temperature Range High=+150°C
"Display Header": library part CMP-1502-01343-1, "THT Vertical Socket Header WR-PHD, Pitch 2.54 mm, Single Row, 16 pins", Contact Resistance=20mOhm, Manufacturer="Wurth Elektronik", Operating Temperature=-40to125degC, Rated Current=3A, Withstanding Voltage=500VAC, Working Voltage=250VAC, Datasheet URL=https://katalog.we-online.de/em/datasheet/6130xx11821.pdf, Gender=Female, Manufacturer URL=http://www.we-online.de, Mounting Technology=THT, Orientation=Vertical, Package Reference=61301611821, Packaging=Tray, Part Number=61301611821, Pin Number=16, Pitch=2.54mm, Publisher=WurthElektronik, Row Number=Single
E1: library part CMP-1559-01732-1, "OMNIMATE Signal - series LM", Colour=Orange, Manufacturer=Weidmueller, Rated_current_min_no_of_poles_TU_20_deg_C="19 A", Rated_current_use_group_B_UL_1059="10 A", Rated_voltage_for_surge_voltage_class_pollution_degree_II_2="320 V", Rated_voltage_use_group_B_UL_1059="300 V", UL_94_flammability_rating=V-2, ComponentLink1Description="Manufacturer URL", ComponentLink1URL=http://www.weidmueller.com/, ComponentLink2Description="URL Link1", ComponentLink2URL=http://catalog.weidmueller.com/catalog/Start.do?localeId=en&ObjectID=1845040000, Contact_material=Cu-Leg, Contact_surface=tinned, Insulating_material=PA, Mounting_onto_the_PCB="Solder connection", No_of_poles=4, PackageReference=LM_3_5_90_04, Packaging=Box, PartNumber=1845040000, Pitch_inch="0,138 inch", Pitch_mm="3,5 mm", Qty="100 PCS", Revision=V1, Short_text_for_material="LM 3.50/04/90 3.2SN OR BX", Side_termination_characteristic="closed side", Solder_pin_length_mm="3,2 mm", Solid_max_H05_07_V_U="1,5 mm²", Solid_min_H05_07_V_U="0,5 mm²", Wire_cross_section_AWG_max_UL_1059="AWG 14", Wire_cross_section_AWG_min_UL_1059="AWG 28"
H1 H2: "Hardware", Manufacturer_Name="ADVANCED THERMAL SOLUTIONS", Mouser Part Number=984-ATS-TI1OP521C1R1, Arrow Part Number=ATS-TI1OP-521-C1-R1, Arrow Price/Stock=https://www.arrow.com/en/products/ats-ti1op-521-c1-r1/advanced-thermal-solutions?region=europe, Datasheet Link=https://media.digikey.com/pdf/Data%20Sheets/Advanced%20Thermal%20Solutions%20PDFs/ATS-TI10P-521-C1-R1.pdf, Height=28mm, Manufacturer_Part_Number=ATS-TI1OP-521-C1-R1, Mouser Price/Stock=https://www.mouser.co.uk/ProductDetail/Advanced-Thermal-Solutions/ATS-TI1OP-521-C1-R1?qs=MLItCLRbWsx43HjcCreTeQ%3D%3D
IC1: "Integrated Circuit", Manufacturer_Name=Microchip, Datasheet Link=http://ww1.microchip.com/downloads/en/DeviceDoc/doc8371.pdf, Height=1.2mm, Manufacturer_Part_Number=ATTINY828-AU
IC2: "Integrated Circuit", Manufacturer_Name=STMicroelectronics, Mouser2 Part Number=511-TDA7439DS13TR, Datasheet Link=https://componentsearchengine.com//TDA7439DS13TR.pdf, Height=2.65mm, Manufacturer_Part_Number=TDA7439DS13TR, Mouser2 Price/Stock=https://www.mouser.com/Search/Refine.aspx?Keyword=511-TDA7439DS13TR
IC3 IC5: "Integrated Circuit", Manufacturer_Name="Texas Instruments", Mouser Part Number=595-TPA3116D2QDADRQ1, Arrow Part Number=TPA3116D2QDADRQ1, Arrow Price/Stock=https://www.arrow.com/en/products/tpa3116d2qdadrq1/texas-instruments?region=nac, Datasheet Link=http://www.ti.com/lit/gpn/tpa3116d2-q1, Height=1.2mm, Manufacturer_Part_Number=TPA3116D2QDADRQ1, Mouser Price/Stock=https://www.mouser.co.uk/ProductDetail/Texas-Instruments/TPA3116D2QDADRQ1?qs=UPLqB4C8V4HphPtdRa3LzQ%3D%3D
IC4: "Integrated Circuit", Manufacturer_Name="Texas Instruments", Mouser Part Number=595-TS5A23157DGSRE4, Arrow Part Number=TS5A23157DGSRE4, Arrow Price/Stock=https://www.arrow.com/en/products/ts5a23157dgsre4/texas-instruments, Datasheet Link=https://www.ti.com/lit/gpn/TS5A23157, Height=1.1mm, Manufacturer_Part_Number=TS5A23157DGSRE4, Mouser Price/Stock=https://www.mouser.co.uk/ProductDetail/Texas-Instruments/TS5A23157DGSRE4?qs=0O%2FZFlpUpJXo8IXKTiIFuQ%3D%3D
IC6 IC7: "Integrated Circuit", Manufacturer_Name="Texas Instruments", Mouser Part Number=595-TPS54332DDA, Arrow Part Number=TPS54332DDA, Arrow Price/Stock=https://www.arrow.com/en/products/tps54332dda/texas-instruments?region=nac, Datasheet Link=http://www.ti.com/lit/ds/symlink/tps54332.pdf, Height=1.7mm, Manufacturer_Part_Number=TPS54332DDA, Mouser Price/Stock=https://www.mouser.co.uk/ProductDetail/Texas-Instruments/TPS54332DDA?qs=uxmOeTEqoPwp5rNW7uC%2FUw%3D%3D
ICSP: library part CMP-1502-01070-1, "THT Vertical Pin Header WR-PHD, Pitch 2.54 mm, Single Row, 6 pins", Contact Resistance=20mOhm, Manufacturer="Wurth Elektronik", Operating Temperature=-40to105degC, Rated Current=3A, Withstanding Voltage=500VAC, Working Voltage=250VAC, Datasheet URL=https://katalog.we-online.de/em/datasheet/6130xx11121.pdf, Gender=Male, Manufacturer URL=http://www.we-online.de, Mounting Technology=THT, Orientation=Vertical, Package Reference=61300611121, Packaging=Bag, Part Number=61300611121, Pin Number=6, Pitch=2.54mm, Publisher=WurthElektronik, Row Number=Single
L2 L3 L4 L5 L6 L7: library part SRP1038A-4R7M, "Inductor", Manufacturer_Name=Bourns, Mouser Part Number=652-SRP1038A-4R7M, Arrow Part Number=SRP1038A-4R7M, Arrow Price/Stock=https://www.arrow.com/en/products/srp1038a-4r7m/bourns?region=nac, Datasheet Link=http://uk.rs-online.com/web/p/products/8193346, Height=4mm, Manufacturer_Part_Number=SRP1038A-4R7M, Mouser Price/Stock=https://www.mouser.co.uk/ProductDetail/Bourns/SRP1038A-4R7M/?qs=7z%252BmIopC6%2FImcvZmY6cLew%3D%3D
L8 L9: library part 710-74437346025, "SMD"
LED1 LED2 LED3 LED4 LED5 LED6 LED7 LED8 LED9 LED10: "LED", Manufacturer_Name=Bivar, Mouser Part Number=749-ELM70303GD, Datasheet Link=https://componentsearchengine.com/Datasheets/2/ELM70303GD.pdf, Height=5.4mm, Manufacturer_Part_Number=ELM70303GD, Mouser Price/Stock=https://www.mouser.co.uk/ProductDetail/Bivar/ELM70303GD?qs=RaByzyhmEWg099B9bvH9wg%3D%3D
MUX Volume: library part CMP-1502-01068-1, "THT Vertical Pin Header WR-PHD, Pitch 2.54 mm, Single Row, 5 pins", Contact Resistance=20mOhm, Manufacturer="Wurth Elektronik", Operating Temperature=-40to105degC, Rated Current=3A, Withstanding Voltage=500VAC, Working Voltage=250VAC, Datasheet URL=https://katalog.we-online.de/em/datasheet/6130xx11121.pdf, Gender=Male, Manufacturer URL=http://www.we-online.de, Mounting Technology=THT, Orientation=Vertical, Package Reference=61300511121, Packaging=Bag, Part Number=61300511121, Pin Number=5, Pitch=2.54mm, Publisher=WurthElektronik, Row Number=Single
R1 R2 R3 R4 R5 R6 R7 R8 R10 R11 R12 R13 R14 R15 R16 R17 R18 R19 R20 R21 R22 R23 R24 R25 R26 R27 R28 R29 R30 R31 R32 R33 R34 R35 R36 R37 R38 R39 R40 R41 R42 R43 R44 R45 R46 R47 R48 R49 R50 SB1 SB2 SB3 SB4 SB5 SB6 SB7 SB8 SB_5V SB_9V SB_15V SB_15V2: library part Res1, "Resistor", LatestRevisionDate=17-Jul-2002, LatestRevisionNote="Re-released for DXP Platform.", PackageDescription="Axial Device, Thru-Hole; 2 Leads; 0.3 in Pin Spacing", PackageReference=AXIAL-0.3, Published=8-Jun-2000, Publisher="Altium Limited"
R9: "Resistor", Manufacturer_Name=Bourns, Mouser Part Number=652-3386P-1-103LF, Arrow Part Number=3386P-1-103LF, Arrow Price/Stock=https://www.arrow.com/en/products/3386p-1-103lf/bourns?region=europe, Datasheet Link=https://www.bourns.com/pdfs/3386.pdf, Manufacturer_Part_Number=3386P-1-103LF, Mouser Price/Stock=https://www.mouser.co.uk/ProductDetail/Bourns/3386P-1-103LF?qs=m2uG%2FFdTAPWTJ6kNGJOVuA%3D%3D
RT1: "Thermistor", Manufacturer_Name=Semitec, Mouser Part Number=954-5D2-18LCS, Datasheet Link=https://www.mouser.com/datasheet/2/362/powerthermistor-4812.pdf, Height=23mm, Manufacturer_Part_Number=5D2-18LCS, Mouser Price/Stock=https://www.mouser.co.uk/ProductDetail/Semitec/5D2-18LCS?qs=wgO0AD0o1vtBHDxl69yjSQ%3D%3D
L1: Code_IEC=1005, Code_JEITA=0402, LatestRevisionDate=29-May-2009, LatestRevisionNote="IPC-7351 Footprint Added.", PackageDescription="Chip Inductor", PackageReference=0402-A, Published=8-Jun-2000, Publisher="Altium Limited"

## Free pads (board coordinates)
  round 4.8 hole 3: 5(139.5,157.375) 6(197.375,157.375) 7(139.625,2.75) 8(197.375,2.625) 9(133.125,9) 10(133.25,157.375) 11(3.5,9.625) 12(2.625,157.375)
  round 1.524 smd: 13(159.2,39.3) 14(159.389,72.242)
  rrect50% 10x5 hole 2.5: 15(46.1,157.4) 16(58.4,157.4) 17(70.9,157.4) 18(83.4,157.4) 19(125.5,157.4) 20(112.3,157.4)
  rrect50% 2.5x5 smd: 21(168.011,64.108) 22(168.083,26.954)
  rrect50% 5x2.5 smd far side: 23(177.719,155.415) 24(184.718,155.395)
  rrect50% 5x10 smd: 27(27.798,125.555) 28(99.32,125.51)

## Via types
v1: diameter 0.7, hole 0.35, Top Layer to Bottom Layer, 159 vias
v2: diameter 1.27, hole 0.711, Top Layer to Bottom Layer, 38 vias
v3: diameter 1.1, hole 0.6, Top Layer to Bottom Layer, 16 vias

## Nets (pads, with @x,y where several pads share a name; then routed paths per layer and width w, separated by ;. In a path a pad name is that pad's centre, name@x,y a point inside that pad or via, vN(x,y) a via of type N, cw(c..) or ccw(c..) an arc to the next point about the centre after c; other vN are vias at no path point)
5V: "Display Header.2" "Display Header.15" "OUTPUT SELECT.3" AMP_5V.2 C1.1 C2.1 C50.1 C51.1 IC1.4 IC4.8 ICSP.1 L1.1 MUTE_LR.3 MUTE_M.3 MUX.1 PSU_5V.1 R2.1 R4.1 R6.1 R8.1 R9.3 R14.1 R16.1 R18.1 R20.1 R35.2 R36.2 R49.1 SB_5V.1 Volume.4 | length 25.9
  Top Layer w0.254: R2.1@3.006,50.875 3.02,50.89 3.02,50.91 R2.1@3.1,50.99 ; R16.1@3.09,29.75 R16.1@3.1,29.74 ; R14.1@3.09,34 R14.1@3.1,33.99 ; R8.1@3.09,38.25 R8.1@3.1,38.24 ; R6.1@3.09,42.5 R6.1@3.1,42.49 ; R4.1@3.09,46.75 R4.1@3.1,46.74 ; R20.1@3.19,21.25 R20.1@3.2,21.24 ; R18.1@3.19,25.5 R18.1@3.2,25.49 ; C1.1@46.875,31.375 C1.1@46.9,31.4 ; v1@50.629,31 v1(50.75,31) ; L1.1@61.621,21.871 L1.1@61.625,21.866 ; IC4.8@69.892,80.775 IC4.8@69.895,80.773
  Top Layer w0.3: v1(68.4,80.8) 68.425,80.775 IC4.8@69.895,80.775
  Top Layer w0.5: v1(150.6,15.7) 150.654,15.7 150.694,15.74 SB_5V.1@151.54,15.74
  Top Layer w0.6: C1.1@46.9,31.4 IC1.4@49,31.4 50.229,31.4 v1@50.629,31
  Top Layer w0.65: v1(1.625,21.25) R20.1@3.19,21.25 ; v1(1.625,25.5) R18.1@3.19,25.5 ; v1(1.625,29.75) R16.1@3.09,29.75 ; v1(1.625,34) R14.1@3.09,34 ; v1(1.625,38.25) R8.1@3.09,38.25 ; v1(1.625,42.5) R6.1@3.09,42.5 ; v1(1.625,46.75) R4.1@3.09,46.75 ; v1(1.625,51) 1.63,50.995 2.886,50.995 R2.1@3.006,50.875 ; C2.1@57.5,24.525 v1(57.5,26) ; v1(61.625,20.375) L1.1@61.625,21.866 ; v1(69.2,53.5) R36.2@69.2,54.9 ; v1(71.5,53.5) R35.2@71.5,54.9
  Top Layer w0.7: R49.1@137.77,23.1 v1(139.22,23.1)
15V: AMP_15V.1 AMP_15V.2 BR1.1 C9.1 C10.1 C12.1 C15.1 C16.1 C29.1 C47.1 C52.1 C53.1 C54.1 C55.1 C56.1 C57.1 C70.1 C71.1 C76.1 C77.1 C78.1 C86.1 C87.1 IC3.17 IC3.18 IC3.19 IC3.31 IC3.32 IC5.17 IC5.18 IC5.19 IC5.31 IC5.32 PSU_15V.1 PSU_15V.2 R10.2 R24.2 R31.2 SB_15V2.2 SB_15V.1 | length 22.3
  Top Layer w0.254: R24.2@20.16,131.555 R24.2@20.26,131.455 ; v1@33.16,112.14 v1(33.26,112.14) ; v1@33.16,112.84 33.26,112.94 v1(33.26,113.04) ; v1@33.16,138.74 33.175,138.725 33.175,138.225 v1(33.26,138.14) ; v1(33.26,113.94) 33.345,113.855 33.345,113.555 33.36,113.54 ; v1(33.26,136.34) 33.345,136.425 33.645,136.425 33.66,136.44 ; v1(33.26,137.24) 33.345,137.325 33.745,137.325 33.76,137.34 ; v1(33.26,139.04) 33.269,139.031 v1@33.269,138.968 ; 33.76,138.44 34.06,138.14 v1(34.16,138.14) ; 33.96,114.54 v1(34.26,114.84) ; v1@33.96,138.14 34.129,137.971 34.129,137.271 v1(34.16,137.24) ; v1@34.06,138.84 34.16,138.94 v1(34.16,139.04) ; v1(34.26,112.14) v1@34.26,112.24 ; v1@34.26,113.74 v1(34.26,113.94) ; v1(104.82,111.96) 104.941,111.96 105.21,112.229 105.369,112.229 ; v1(104.82,113.76) 104.82,113.66 v1@104.92,113.56 ; v1(104.82,114.66) 104.905,114.575 104.905,114.375 v1@104.92,114.36 ; 105.22,113.66 105.22,113.942 105.82,114.542 v1(105.82,114.66) ; v1(105.82,111.96) v1@105.82,112.06
  Top Layer w0.5: SB_15V2.2@179.148,26.243 v1(180.589,26.243) ; SB_15V.1@179.189,63.442 181.089,63.442 ; C77.1@181.089,62.242 181.089,63.442 ; v1(182.589,63.442) 181.089,63.442
  Top Layer w0.65: C47.1@18.06,131.555 v1(18.06,133.255) ; C78.1@144.531,129.314 v1(144.531,130.914)
  Top Layer w0.7: R31.2@91.22,133.06 v1(92.72,133.06)
  Top Layer w1.2: R10.2@15.86,131.555 C47.1@17.56,131.555 ; C47.1@18.06,131.555 R24.2@20.16,131.555
  other v1: 104.82,112.86 105.82,112.86 34.26,113.04 105.82,113.76 33.26,114.84 34.16,136.34 104.82,136.36 105.82,136.36 104.82,137.26 105.82,137.26 104.82,138.16 105.82,138.16 104.82,139.06 105.82,139.06
+9: AMP_9V.2 IC2.24 PSU_9V.1 R50.1 SB_9V.2 | length 17.8
  Top Layer w0.254: IC2.24@56.325,78 IC2.24@56.337,78.013 ; v2(73.5,74.1) v2@73.55,74.15 ; R50.1@137.77,60.21 R50.1@137.78,60.2
  Top Layer w0.5: v1(150.649,52.842) SB_9V.2@151.549,52.842
  Top Layer w0.65: IC2.24@56.337,78 58.411,78 58.436,78.025 v1(58.45,78.025)
  Top Layer w0.7: R50.1@137.78,60.2 v1(139.23,60.2)
  Top Layer w1.2: v2@73.523,74.123 73.523,74.109 73.532,74.1 v2(86.7,74.1)
AC1: E1.A1 E1.A2 pad.24 RT1.1
AC2: BR1.3 E1.A3 E1.A4 pad.23
AC3: BR1.2 RT1.2
AVCC: Bass.3 C21.1 Gain.3 IC1.18 L1.2 Mid_Range.3 Trebble.3 | length 82.2
  Top Layer w0.254: Mid_Range.3@93.5,4.5 Mid_Range.3@93.522,4.522 ; 93.5,6.5 93.522,6.478
  Top Layer w0.6: IC1.18@57.5,29 58.631,29 58.87,28.761 59.5,28.131 59.5,27.472 59.851,27.121 60.14,27.121 60.991,27.234 61.279,27.234 61.468,27.044 61.481,27.03 L1.2@61.621,26.871
  Top Layer w1.2: L1.2@61.671,26.821 66.929,26.821 67.5,26.25 67.5,19.375 62.309,14.184 62.309,6.5 ; Gain.3@62.309,4.125 62.309,6.5 ; Bass.3@84.768,4.125 84.768,6.5 ; Mid_Range.3@93.522,4.522 93.522,6.478 ; Trebble.3@102.276,4.125 102.276,5.924 101.7,6.5 93.5,6.5 84.768,6.5 ; 62.309,6.5 84.768,6.5
BassADC: Bass.2 IC1.22 | length 57.4
  Top Layer w0.254: IC1.22@57.5,32.2 57.525,32.225 87.1,32.225 v1(87.125,32.25)
  Bottom Layer w0.254: v1(87.125,32.25) 87.21,32.165 87.21,4.54 Bass.2@87.25,4.5
BIN_L: C27.1 IC2.14 | length 2.7
  Top Layer w0.5: 46.5,64.2 46.5,66.495 46.575,66.57 IC2.14@46.901,66.57
BIN_R: C25.1 IC2.12 | length 4.1
  Top Layer w0.65: C25.1@43.5,67.525 43.5,67.625 43.775,67.9 44.075,67.9 45.285,69.11 IC2.12@46.901,69.11
BOOT_5V: C75.1 IC7.1 | length 11.2
  Top Layer w0.65: IC7.1@170.789,25.038 172.084,25.038 172.589,24.533 v1(172.589,19.543)
  Bottom Layer w0.65: C75.1@168.389,19.543 v1(172.589,19.543)
BOOT_9V: C74.1 IC6.1 | length 11.3
  Top Layer w0.65: IC6.1@170.701,62.237 171.894,62.237 172.489,61.642 v1(172.489,56.442)
  Bottom Layer w0.65: C74.1@168.389,56.442 v1(172.489,56.442)
BOUT_L: C28.1 IC2.15 | length 7.6
  Top Layer w0.5: C28.1@50.454,64.154 50.454,65.454 51.57,66.57 IC2.15@56.325,66.57
BOUT_R: C26.1 IC2.13 | length 5.5
  Top Layer w0.65: C26.1@43.45,65.271 44.926,65.271 45.075,65.42 45.075,67.15 45.765,67.84 IC2.13@46.901,67.84
BSNL: C33.1 IC3.20 | length 5
  Top Layer w0.45: IC3.20@31.586,122.63 33.17,122.63 34.36,121.44 C33.1@36.06,121.44
BSNL_M: C69.1 IC5.20 | length 5.2
  Top Layer w0.45: IC5.20@103.108,122.585 104.395,122.585 105.72,121.26 C69.1@107.72,121.26
BSNR: C31.1 IC3.26 | length 10.2
  Top Layer w0.45: IC3.26@31.586,126.53 40.95,126.53 C31.1@41.56,127.14
BSNR_M: C64.1 IC5.26 | length 11.1
  Top Layer w0.45: IC5.26@103.108,126.485 113.245,126.485 113.52,126.76 C64.1@113.52,127.36
BSPL: C32.1 IC3.24 | length 10.5
  Top Layer w0.254: C32.1@41.66,124.64 C32.1@41.86,124.64
  Top Layer w0.45: IC3.24@31.586,125.23 41.07,125.23 C32.1@41.66,124.64
BSPL_M: C65.1 IC5.24 | length 11.2
  Top Layer w0.45: IC5.24@103.108,125.185 113.195,125.185 113.52,124.86 C65.1@113.52,124.16
BSPR: C30.1 IC3.30 | length 4.8
  Top Layer w0.45: IC3.30@31.586,129.13 33.05,129.13 34.36,130.44 C30.1@35.86,130.44
BSPR_M: C60.1 IC5.30 | length 5
  Top Layer w0.45: IC5.30@103.108,129.085 104.545,129.085 105.72,130.26 C60.1@107.62,130.26
COMP_5V: C89.2 C93.2 IC7.6 | length 6.7
  Top Layer w0.254: C93.2@162.389,28.343 C93.2@162.489,28.243
  Top Layer w0.65: C93.2@162.489,28.243 163.489,28.243 164.154,27.578 IC7.6@165.365,27.578
  Top Layer w1.4: C89.2@160.489,31.043 161.289,31.043 ; 161.489,31.043 162.389,30.143 C93.2@162.389,28.843
COMP_9V: C84.2 C92.2 IC6.6 | length 7.2
  Top Layer w0.65: C92.2@162.289,65.342 163.289,65.342 163.854,64.777 IC6.6@165.277,64.777
  Top Layer w1.4: C84.2@159.989,68.442 160.889,68.442 ; 161.089,68.442 161.989,67.542 C92.2@161.989,65.742
CREF: C19.1 IC2.23 | length 4.9
  Top Layer w0.254: C19.1@61.155,76.73 C19.1@61.2,76.775
  Top Layer w0.65: IC2.23@56.325,76.73 C19.1@61.155,76.73
EN_5V: IC7.3 R42.2 R48.1 | length 7.9
  Top Layer w0.254: R42.2@176.389,28.343 R42.2@176.443,28.397
  Top Layer w0.65: IC7.3@170.789,27.578 172.924,27.578 174.689,29.343 176.189,29.343
  Top Layer w1.4: R42.2@176.443,28.397 R48.1@176.443,30.097
EN_9V: IC6.3 R41.2 R47.1 | length 8.3
  Top Layer w0.254: R47.1@176.389,67.542 R47.1@176.443,67.488
  Top Layer w0.65: IC6.3@170.701,64.777 173.124,64.777 174.789,66.442 176.189,66.442
  Top Layer w1.4: R41.2@176.443,65.488 R47.1@176.443,67.488
FAULT/SD: IC3.2 IC3.3 R24.1 | length 5.9
  Top Layer w0.254: R24.1@20.56,129.755 R24.1@20.585,129.78
  Top Layer w0.45: R24.1@20.585,129.78 IC3.2@24.01,129.78 ; 22.06,129.755 22.06,129.355 22.285,129.13 IC3.3@24.01,129.13
FAULT/SD_M: IC5.2 IC5.3 R31.1 | length 7.8
  Top Layer w0.45: 91.22,130.66 91.22,130.16 91.645,129.735 IC5.2@95.532,129.735 ; 93.22,129.66 93.22,129.26 93.395,129.085 IC5.3@95.532,129.085
GAIN/SLV: IC3.8 R19.1 R22.2 | length 12.1
  Top Layer w0.254: R19.1@15.06,122.4 R19.1@15.114,122.455 ; IC3.8@23.85,125.88 IC3.8@23.875,125.905
  Top Layer w0.45: R19.1@15.114,122.455 16.561,122.455 16.825,122.718 19.987,125.88 IC3.8@23.85,125.88
  Top Layer w1.4: R22.2@15.06,120.346 R19.1@15.06,122.155
GAIN/SLV_M: IC5.8 R26.1 R28.2 | length 8.9
  Top Layer w0.45: R26.1@88.72,125.26 90.52,125.26 91.095,125.835 IC5.8@95.532,125.835
  Top Layer w1.4: R28.2@88.72,123.26 R26.1@88.72,125.06
GainADC: Gain.2 IC1.17 | length 28.7
  Top Layer w0.254: v1(56.125,28.125) 56.163,28.163 57.038,28.163 IC1.17@57.125,28.25
  Bottom Layer w0.254: v1(56.125,28.125) 56.125,16.375 64.849,7.651 Gain.2@64.849,4.125
GND: "Display Header.1" "Display Header.5" "Display Header.16" "OUTPUT SELECT.1" AMP_5V.1 AMP_9V.1 AMP_GND.1 AMP_GND.2 Bass.1 BR1.4 C1.2 C2.2 C8.2 C9.2 C10.2 C12.2 C15.2 C16.2 C17.2 C18.2 C19.2 C21.2 C29.2 C35.1 C36.1 C37.2 C38.2 C41.1 C42.1 C43.2 C44.2 C46.2 C47.2 C50.2 C51.2 C52.2 C53.2 C54.2 C55.2 C56.2 C57.2 C58.2 C62.1 C63.1 C66.2 C67.2 C70.2 C71.2 C72.1 C73.1 C76.2 C77.2 C78.2 C79.1 C80.1 C81.1 C82.1 C83.1 C85.1 C86.2 C87.2 C88.1 C90.1 C91.1 C92.1 C93.1 D1.2 D2.2 Gain.1 H1.1 H1.2 H2.1 H2.2 IC1.5 IC1.21 IC2.20 IC2.25 IC3.1 IC3.9 IC3.13 IC3.14 IC3.15 IC3.22 IC3.25 IC3.28 IC3.33 IC4.3 IC5.1 IC5.9 IC5.10 IC5.11 IC5.13 IC5.14 IC5.15 IC5.22 IC5.25 IC5.28 IC5.33 IC6.7 IC6.9 IC7.7 IC7.9 ICSP.6 INPUT1.3 INPUT2.3 INPUT3.3 INPUT4.3 LED9.2 LED10.2 Mid_Range.1 MUTE_LR.1 MUTE_M.1 pad.21 pad.22 pad.27 pad.28 PSU_5V.2 PSU_9V.2 PSU_GND.1 PSU_GND.2 R1.1 R3.1 R5.1 R7.1 R9.1 R11.1 R12.2 R13.1 R15.2 R22.1 R23.1 R25.2 R27.2 R28.1 R32.1 R33.2 R34.1 R37.1 R38.1 R39.1 R40.1 R43.2 R44.2 R45.2 R46.2 R47.2 R48.2 Trebble.1 Volume.5 | length 6.4
  Top Layer w0.254: R22.1@14.86,118.455 R22.1@14.96,118.355 ; 25.243,125.24 25.247,125.244 ; 58.905,31.4 58.909,31.404
  Top Layer w0.6: 55.788,31.4 IC1.21@57.5,31.4 58.905,31.4
  Bottom Layer w0.7: C50.2@71.7,77.9 v1(73.2,77.9) ; C51.2@71.7,83.7 v1(73.3,83.7)
  other v2: 97.32,120.76 99.32,120.76 101.32,120.76 25.76,121.105 27.76,121.105 29.76,121.105 97.32,122.56 99.32,122.56 101.32,122.56 25.76,122.73 27.76,122.73 29.76,122.73 25.76,124.355 27.76,124.355 29.76,124.355 97.32,124.6 99.32,124.6 101.32,124.6 97.32,126.8 99.32,126.8 101.32,126.8 25.76,126.855 27.76,126.855 29.76,126.855 25.76,128.48 27.76,128.48 29.76,128.48 97.32,128.5 99.32,128.5 101.32,128.5 97.32,130.06 99.32,130.06 101.32,130.06 25.76,130.105 27.76,130.105 29.76,130.105
  other v3: 167.189,24.343 168.989,24.343 167.189,26.043 168.989,26.043 167.189,27.743 168.989,27.743 167.189,29.443 168.989,29.443 167.089,61.542 168.789,61.542 167.089,63.242 168.789,63.242 167.089,64.942 168.789,64.942 167.089,66.642 168.789,66.642
GVDD: C46.1 IC3.6 IC3.7 R19.2 | length 17.1
  Top Layer w0.254: R19.2@14.96,124.455 R19.2@15.06,124.555 ; 15.16,126.455 15.235,126.53
  Top Layer w0.45: 15.235,126.53 IC3.7@24.01,126.53 ; 21.66,126.655 21.66,127.031 21.809,127.18 IC3.6@24.01,127.18
  Top Layer w1.2: C46.1@12.806,122.3 12.906,122.3 12.906,123.497 13.609,124.2 R19.2@14.96,124.2 ; R19.2@15.06,124.555 15.06,126.155
GVDD_M: C58.1 IC5.6 IC5.7 R26.2 | length 14.1
  Top Layer w0.254: C58.1@86.22,125.06 C58.1@86.22,125.606 ; 93.22,127.135 93.22,127.16
  Top Layer w0.45: R26.2@88.745,127.135 93.22,127.135 ; IC5.7@95.532,126.485 93.395,126.485 93.22,126.66 93.22,127.135 ; IC5.6@95.532,127.135 93.22,127.135
  Top Layer w1.2: C58.1@86.22,125.06 86.32,125.06 86.32,126.06 87.32,127.06 R26.2@88.72,127.06
IN_L: IC2.27 IC4.6 | length 13.6
  Top Layer w0.3: IC2.27@56.325,81.81 56.36,81.775 IC4.6@69.892,81.775
IN_LEFT: C48.1 IC4.7 | length 93.2
  Top Layer w0.3: C48.1@5.1,116.5 5.1,115 8.7,111.4 13.6,111.4 18,107 18,100.5 21.1,97.4 66.1,97.4 71.4,92.1 71.4,81.7 70.975,81.275 IC4.7@69.892,81.275
IN_LEFT_M: IC4.4 R29.2 | length 41.9
  Top Layer w0.254: IC4.4@74.6,81.3 v1(76.2,81.3) ; v1(81.7,81.3) 81.774,81.374 R29.2@81.774,116.06
  Bottom Layer w0.254: v1(76.2,81.3) v1(81.7,81.3)
IN_R: IC2.26 IC4.10 | length 13.9
  Top Layer w0.3: IC2.26@56.325,80.54 57.98,80.54 58.745,79.775 IC4.10@69.892,79.775
IN_RIGHT: C49.1 IC4.9 | length 86
  Top Layer w0.254: C49.1@14.43,113.855 14.43,112.73 19.1,108.06 19.1,100.8 21.4,98.5 67.2,98.5 72.2,93.5
  Top Layer w0.3: IC4.9@69.892,80.275 71.075,80.275 72.2,81.4 72.2,93.5
IN_RIGHT_M: IC4.2 R30.2 | length 40.9
  Top Layer w0.254: IC4.2@74.292,80.275 79.371,80.275 79.52,80.424 R30.2@79.52,116.06
INPUTL_1: C3.1 INPUT1.1 | length 2.5
  Top Layer w0.65: INPUT1.1@4.15,104.7 C3.1@6.65,104.7
INPUTL_2: C4.1 INPUT2.1 | length 3.1
  Top Layer w0.254: INPUT2.1@3.75,94.5 INPUT2.1@3.8,94.45 ; C4.1@6.6,94.45 6.475,94.45 C4.1@6.625,94.6
  Top Layer w0.65: INPUT2.1@3.8,94.45 C4.1@6.475,94.45